# Altium PCB PCB_SUB_BUTTON.PcbDoc
Units mm, origin at the board's own origin, x right, y up, seen from the top; angles counter-clockwise.
Board outline 60.55 x 90.09 mm, 2 copper layers (Top Layer, Bottom Layer); 20 components, 20 nets, 84 pads, 28 vias.
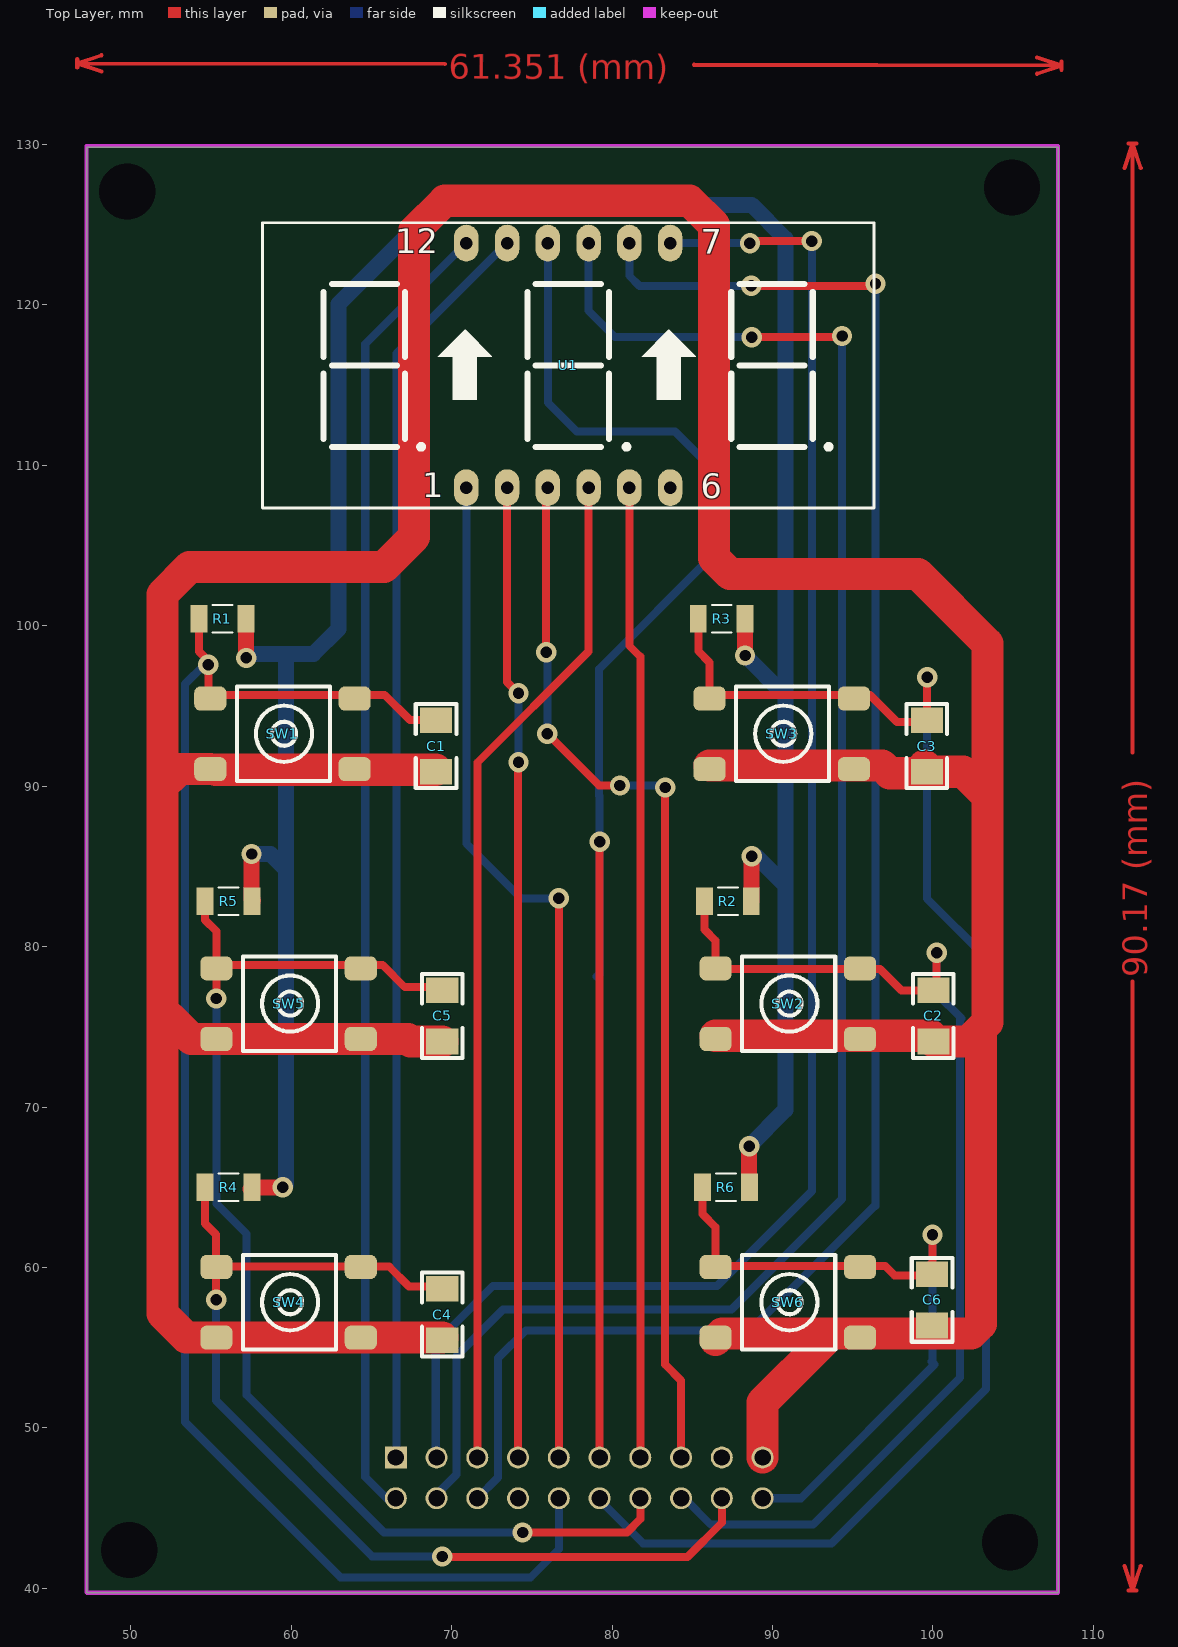
[diagram p0: Top Layer view]
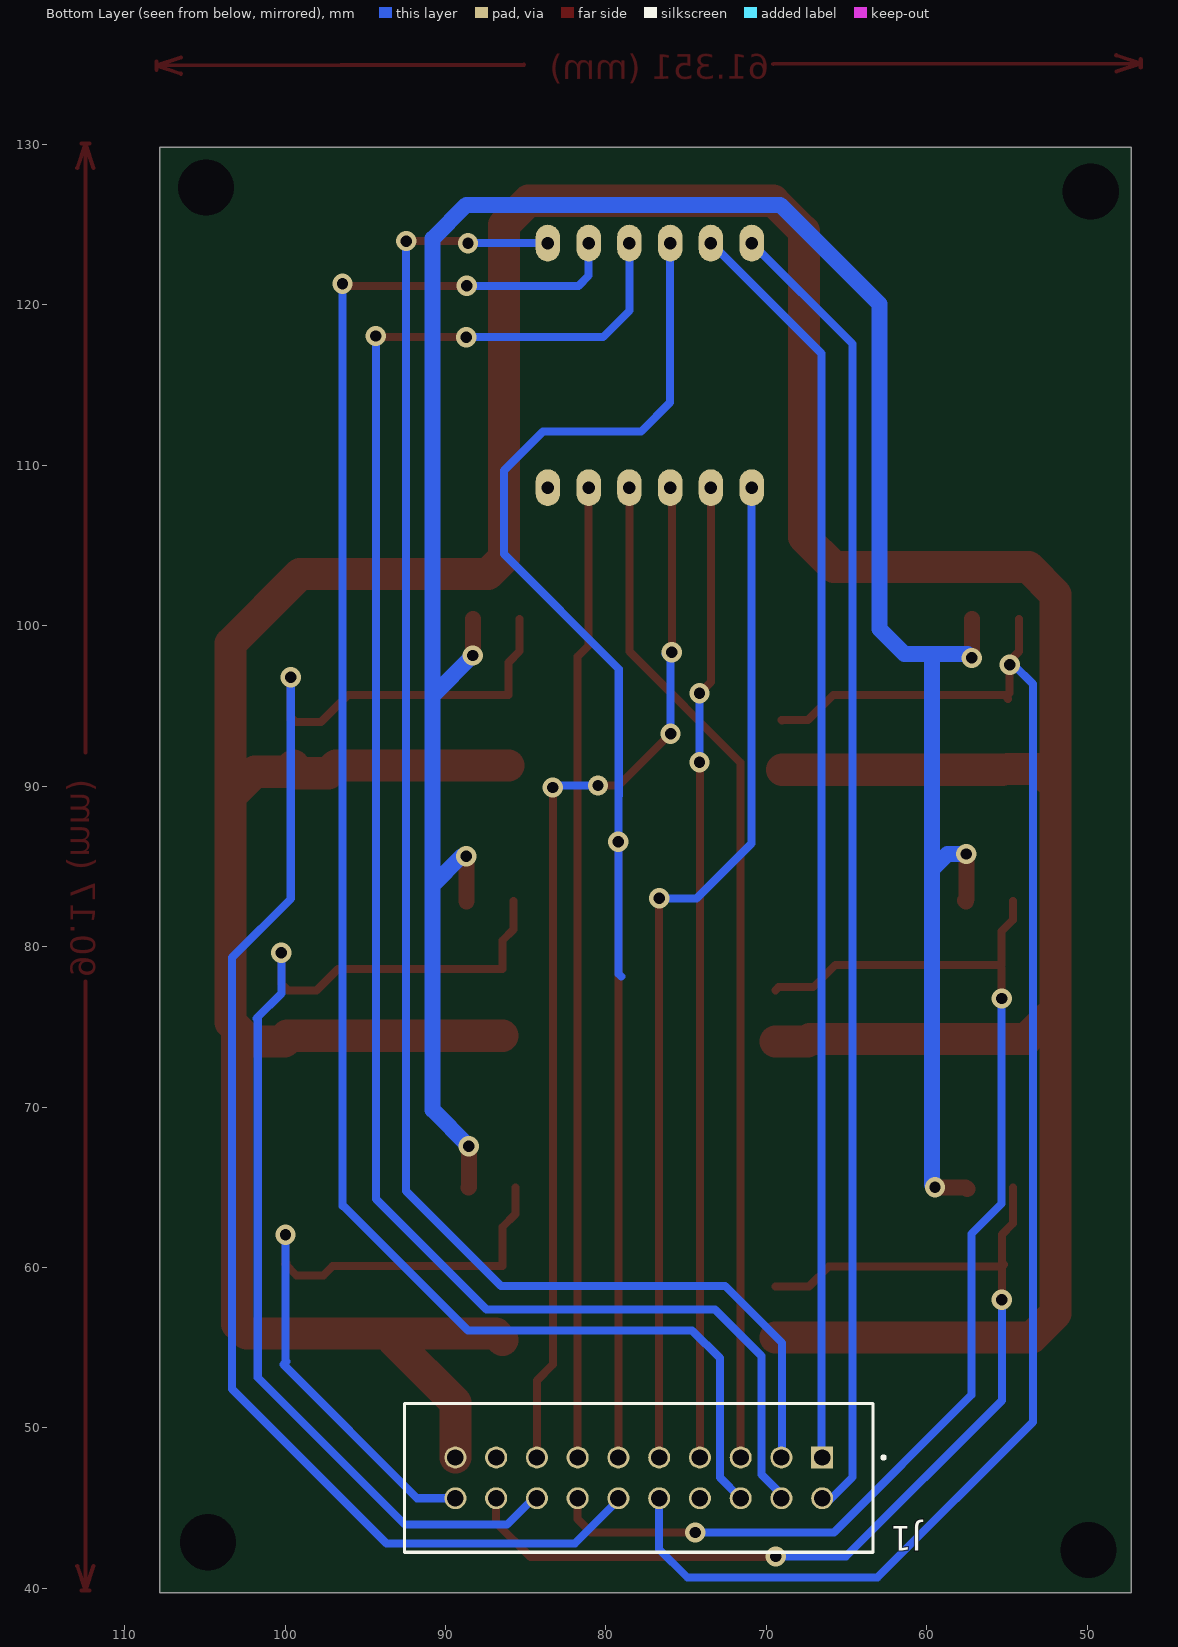
[diagram p1: Bottom Layer view, seen from below]
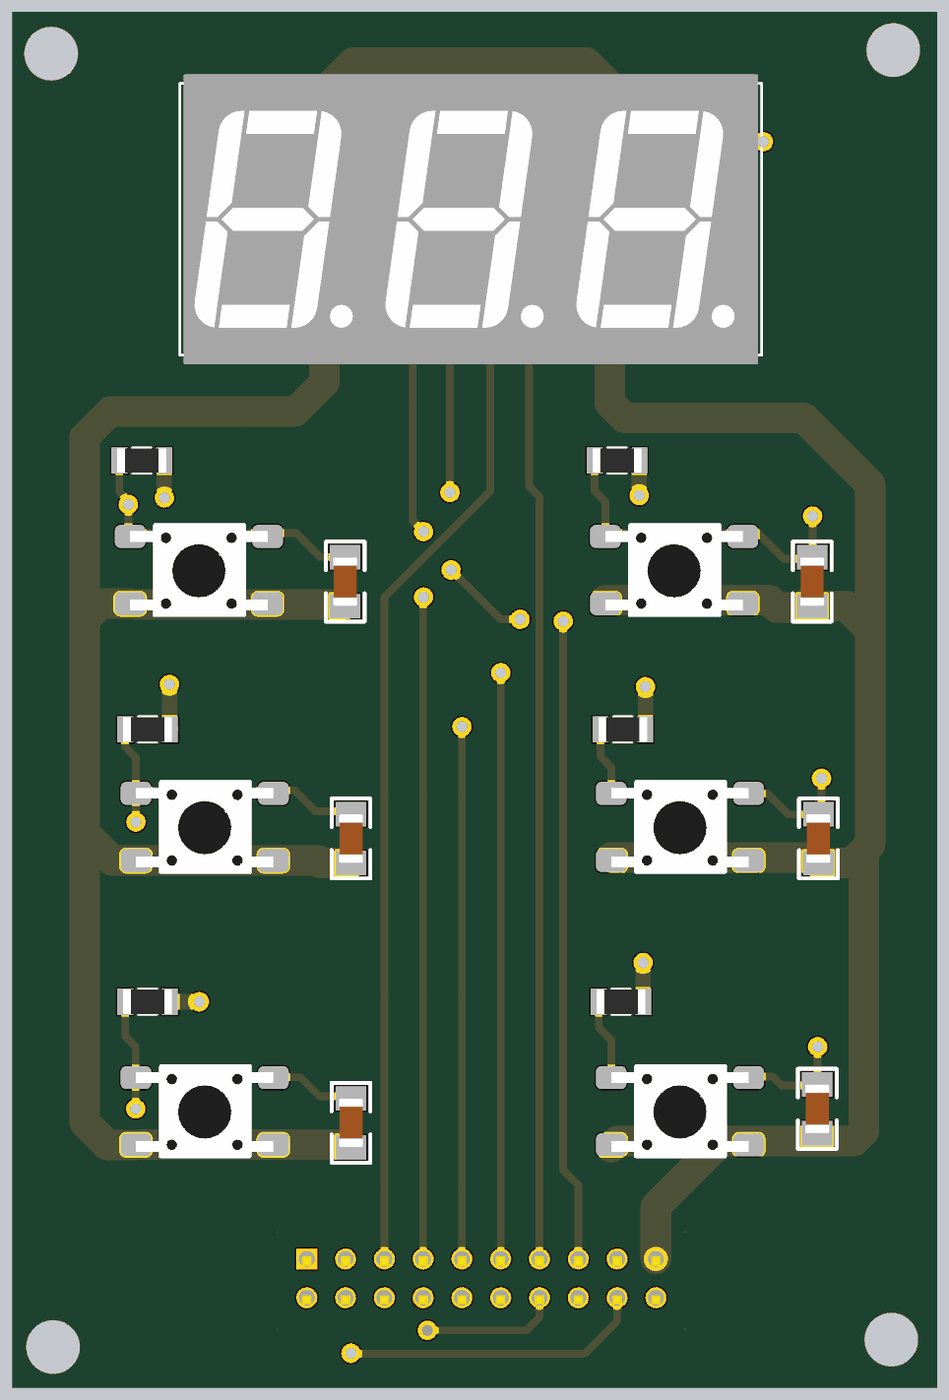
[diagram p2: 3D render of the assembled board from above, using the file's embedded part models]

## Layer stack, top to bottom
Top Solder: solder mask 0.0102, Solder Resist, Dk 3.5
Top Layer: signal copper 0.0356
Dielectric 1: dielectric 0.32, FR-4, Dk 4.8
Bottom Layer: signal copper 0.0356
Bottom Solder: solder mask 0.0102, Solder Resist, Dk 3.5

## Board outline
47.244,39.751 47.269,39.726 107.798,39.726 107.798,129.819 47.244,129.819

## Design rules (kind name [scope] priority, off if disabled: settings)
Clearance [All] p1: gap=0.254
PolygonConnect [All] p1: connectstyle=Relief reliefconductorwidth=0.254 reliefentries=4 polygonreliefangle="90 Angle" airgapwidth=0.254
RoutingVias [All] p1: holewidth=0.711 width=1.27 viastyle="Through Hole" minholewidth=0.711 minwidth=1.27 maxholewidth=0.711 maxwidth=1.27
SolderMaskExpansion [All] p1: expansion=0.102
Width [All] p1: maxlimit=3 minlimit=0.5 preferedwidth=1
30 further rules are at their usual default settings.

## Components (designator, comment, footprint, x,y, rotation, side; value= is the part's Value field where it differs from the comment)
C1 "Cap_SMD" CAP_SMD_1206 69.037,92.507 r90 top
C2 "Cap_SMD" CAP_SMD_1206 100.025,75.686 r90 top
C3 "Cap_SMD" CAP_SMD_1206 99.619,92.507 r90 top
C4 "Cap_SMD" CAP_SMD_1206 69.418,57.074 r90 top
C5 "Cap_SMD" CAP_SMD_1206 69.418,75.686 r90 top
C6 "Cap_SMD" CAP_SMD_1206 99.949,57.988 r90 top
J1 "JTAG 10x2" JTAG 66.523,48.158 r0 bottom
R1 "Res_SMD" Res_SMD_1206 55.717,100.432 r180 top
R2 "Res_SMD" Res_SMD_1206 87.217,82.829 r180 top
R3 "Res_SMD" Res_SMD_1206 86.836,100.432 r180 top
R4 "Res_SMD" Res_SMD_1206 56.098,64.999 r180 top
R5 "Res_SMD" Res_SMD_1206 56.098,82.829 r180 top
R6 "Res_SMD" Res_SMD_1206 87.097,64.999 r180 top
SW1 "Button6x6" Button6x6smd 59.457,93.265 r180 top
SW2 "Button6x6" Button6x6smd 90.957,76.444 r180 top
SW3 "Button6x6" Button6x6smd 90.576,93.265 r180 top
SW4 "Button6x6" Button6x6smd 59.838,57.832 r180 top
SW5 "Button6x6" Button6x6smd 59.838,76.444 r180 top
SW6 "Button6x6" Button6x6smd 90.957,57.832 r180 top
U1 "7SEG" 7SEG 70.917,108.61 r0 top

## Footprints (in the part's own frame and the unit in brackets; to place one, negate y for a bottom-side part, rotate by r counter-clockwise, add the part's x,y. Pads: shape width x height; smd on the part's side, far side on the other; paste and mask are expansions set on the pad)
7SEG [mil] "DIP 12 Leads; Body 48 x 20 mm; Pitch 0.5 mm"
  oval 60x90 hole 31: 1(0,0) 2(100,0) 3(200,0) 4(300,0) 5(400,0) 6(500,0) 7(500,600) 8(400,600) 9(300,600) 10(200,600) 11(100,600) 12(0,600)
  silkscreen extent -500,-50 1000,650, body extent -490,-74 990,674, height 400
Button6x6smd [mm] "key smd"
  rrect50% 2x1.5 smd: 1(4.5,-2.2) 2(-4.5,-2.2) 3(4.5,2.2) 4(-4.5,2.2)
  Top Layer pour cut-out: -6,3.5 6,3.5 6,-3.5 -6,-3.5
  silkscreen extent -2.95,-2.95 2.85,2.95, body extent -4.5,-2.95 4.5,3.05, height 4.3
CAP_SMD_1206 [mm] "cap smd 1206"
  rect 1.6x2 smd: 1(-1.605,0) 2(1.595,0)
  Top Layer pour cut-out: -0.8,0.9 0.8,0.9 0.8,-0.9 -0.8,-0.9
  silkscreen extent -2.62,-1.27 2.62,1.27, body extent -1.6,-0.8 1.6,0.8, height 1.22
JTAG [mm] "JTAG 10x2"
  rect 1.37x1.37 hole 1.02: 01(0,0)
  round 1.37 hole 1.02: 02(0,2.54) 03(2.54,0) 04(2.54,2.54) 05(5.08,0) 06(5.08,2.54) 07(7.62,0) 08(7.62,2.54) 09(10.16,0) 10(10.16,2.54) 11(12.7,0) 12(12.7,2.54) 13(15.24,0) 14(15.24,2.54) 15(17.78,0) 16(17.78,2.54) 17(20.32,0) 18(20.32,2.54) 19(22.86,0) 20(22.86,2.54)
  silkscreen extent -3.92,-3.36 26.04,5.9, body extent -3.18,-3.43 26.03,6.05, height 8.89
Res_SMD_1206 [mm] "res smd 1206"
  rect 1.05x1.72 smd: 1(-1.46,0) 2(1.46,0)
  Top Layer pour cut-out: -0.9,0.8 0.9,0.8 0.9,-0.8 -0.9,-0.8
  silkscreen extent -0.62,-0.85 0.62,0.85, body extent -1.6,-0.8 1.6,0.8, height 0.6

## Part data
C1 C2 C3 C4 C5 C6: "Cap SMD multiple types as 0402 0603 0805 1206"
J1: "Connector Header Through Hole 20 position 0.100 (2.54mm)"
R1 R2 R3 R4 R5 R6: "res smd"
SW1 SW2 SW3 SW4 SW5 SW6: "button 6x6 mm"
U1: library part "LED 7SEG", "Three 7 Seg Dipslay"

## Free pads (board coordinates)
  round 1.524 hole 3.5: 0(49.784,127.076) 0(49.911,42.393) 0(104.8,42.875) 0(104.927,127.305)

## Via types
v1: diameter 1.27, hole 0.711, Top Layer to Bottom Layer, 28 vias

## Nets (pads, with @x,y where several pads share a name; then routed paths per layer and width w, separated by ;. In a path a pad name is that pad's centre, name@x,y a point inside that pad or via, vN(x,y) a via of type N, cw(c..) or ccw(c..) an arc to the next point about the centre after c; other vN are vias at no path point)
5V: R1.1 R2.1 R3.1 R4.1 R5.1 R6.1 | length 172.6
  Top Layer w1: R1.1 57.177,98.017 v1(57.201,97.993) ; R4.1@57.48,64.897 57.582,64.999 v1(59.487,64.999) ; v1(57.531,85.776) 57.531,82.955 57.607,82.878 R5.1 ; v1(88.29,98.146) 88.296,98.152 R3.1 ; v1(88.544,67.564) 88.544,65.011 R6.1 ; R2.1 88.697,82.849 v1(88.697,85.623)
  Bottom Layer w1: v1(57.201,97.993) 57.455,98.247 61.392,98.247 62.941,99.797 62.941,120.04 69.139,126.238 88.697,126.238 90.805,124.13 90.805,83.82 ; v1(57.531,85.776) 58.699,85.776 59.665,84.811 ; v1(59.487,64.999) 59.665,65.176 59.665,84.811 ; 59.665,97.993 59.665,84.811 ; v1(88.29,98.146) 90.729,95.707 ; v1(88.544,67.564) 90.805,69.825 90.805,83.82 ; v1(88.697,85.623) 89.002,85.623 90.805,83.82
BUT_IN_1: C1.2 J1.10 R1.2 SW1.1 SW1.2 | length 99.2
  Top Layer w0.5: R1.2 54.257,98.397 54.839,97.815 v1(54.839,97.561) 54.839,95.806 SW1.1@54.957,95.688 ; SW1.1@54.929,95.436 SW1.1 SW1.1@54.957,95.688 ; C1.2 C1.2@69.063,94.127 ; C1.2@69.037,94.121 67.397,94.121 65.831,95.688 SW1.1@54.957,95.688
  Bottom Layer w0.5: v1(54.839,97.561) 54.585,97.561 53.391,96.368 53.391,50.368 63.068,40.691 74.93,40.691 76.683,42.443 J1.10
BUT_IN_2: C3.2 J1.12 R3.2 SW3.1 SW3.2 | length 97.2
  Top Layer w0.5: R3.2 85.376,98.418 86.076,97.718 86.076,95.688 96.082,95.688 97.765,94.005 99.325,94.005 C3.2@99.52,94.201 ; C3.2 99.644,94.127 v1(99.644,96.799)
  Bottom Layer w0.5: J1.12 79.172,45.568 81.94,42.799 93.675,42.799 103.302,52.426 103.302,79.324 99.619,83.007 99.644,83.033 99.644,94.087 ; 99.639,94.082 99.644,94.087 ; v1(99.644,96.799) 99.644,94.087
BUT_IN_3: C5.2 J1.14 R5.2 SW5.1 SW5.2 | length 76.1
  Top Layer w0.5: R5.2 54.638,81.658 55.338,80.958 55.338,78.847 65.704,78.847 67.081,77.47 69.229,77.47 C5.2 ; v1(55.338,76.767) SW5.1 ; v1(74.422,43.485) 80.924,43.485 81.763,44.323 J1.14
  Bottom Layer w0.5: v1(55.338,76.767) 55.338,63.974 57.226,62.086 57.226,52.045 65.786,43.485 v1(74.422,43.485)
BUT_IN_4: C2.2 J1.16 R2.2 SW2.1 SW2.2 | length 70
  Top Layer w0.5: R2.2 85.757,81.07 86.457,80.37 SW2.1 86.457,78.613 96.698,78.613 98.044,77.267 99.808,77.267 100.228,77.688 v1(100.228,79.629)
  Bottom Layer w0.5: J1.16 84.506,45.618 86.157,43.967 92.532,43.967 101.702,53.137 101.702,75.463 101.772,75.534 100.228,77.078 v1(100.228,79.629)
BUT_IN_5: C4.2 J1.18 R4.2 SW4.1 SW4.2 | length 66.6
  Top Layer w0.5: R4.2 54.638,62.735 55.321,62.052 55.321,60.173 55.197,60.173 SW4.1@55.321,60.049 ; v1(55.321,57.988) SW4.1@55.321,60.049 ; SW4.1 SW4.1@55.321,60.049 ; v1@69.418,41.961 84.709,41.961 86.843,44.094 J1.18 ; v1(69.418,41.986) v1@69.418,42.24 ; C4.2@69.418,58.815 67.346,58.815 66.113,60.049 SW4.1@55.321,60.049
  Bottom Layer w0.5: v1(55.321,57.988) 55.321,51.714 65.049,41.986 v1(69.418,41.986)
BUT_IN_6: C6.2 J1.20 R6.2 SW6.1 SW6.2 | length 43.6
  Top Layer w0.5: R6.2 85.637,63.334 86.457,62.514 86.457,60.096 97.028,60.096 97.612,59.512 99.299,59.512 100,60.213 99.924,60.289 99.974,60.34 v1(99.974,62.052)
  Bottom Layer w0.5: J1.20 91.77,45.618 100.101,53.95 99.924,54.127 99.974,54.178 v1(99.974,62.052)
GND: C1.1 C2.1 C3.1 C4.1 C5.1 C6.1 J1.19 SW1.3 SW1.4 SW2.3 SW2.4 SW3.3 SW3.4 SW4.3 SW4.4 SW5.3 SW5.4 SW6.3 SW6.4 | length 296.3
  Top Layer w2: 52.451,75.59 53.797,74.244 SW5.3 SW5.4 67.285,74.244 67.447,74.081 C5.1 ; 52.451,90.475 53.041,91.065 SW1.3 ; SW1.3@55.298,91.023 C1.1@69.012,91.023 ; SW4.3 53.461,55.632 51.968,57.125 51.968,101.956 53.67,103.657 65.786,103.657 67.666,105.537 67.666,124.587 69.571,126.492 84.836,126.492 86.36,124.968 86.36,104.216 87.351,103.226 99.06,103.226 103.403,98.882 103.403,89.373 ; SW4.3@55.704,55.641 C4.1@69.418,55.641 ; SW3.3@86.076,91.288 96.825,91.288 97.307,90.805 99.324,90.805 99.644,91.125 C3.1@99.481,91.288 ; SW6.3@86.457,55.469 86.868,55.88 102.387,55.88 102.997,56.49 102.997,74.879 102.199,74.081 C2.1 ; SW2.3@86.457,74.447 99.862,74.447 C2.1@100.025,74.285 ; J1.19 89.383,51.583 93.269,55.469 ; C3.1 101.875,90.902 103.403,89.373 ; 103.403,75.286 103.403,89.373
LED_7_1: J1.01 U1.11 | length 78.6
  Bottom Layer w0.5: J1.01 66.573,48.209 66.573,116.967 U1.11
LED_7_2: J1.03 U1.7 | length 102.7
  Top Layer w0.5: v1(88.595,123.85) 88.621,123.876 88.748,123.749 88.976,123.977 v1(92.456,123.977)
  Bottom Layer w0.5: J1.03 69.012,48.209 69.012,55.296 72.568,58.852 86.538,58.852 92.456,64.77 v1(92.456,123.977) ; U1.7 v1(88.595,123.85)
LED_7_3: J1.05 U1.4 | length 63.3
  Top Layer w0.5: J1.05 71.603,91.465 78.537,98.4 U1.4
LED_7_4: J1.07 U1.2 | length 60.8
  Top Layer w0.5: U1.2 73.457,96.495 v1(74.168,95.783) ; J1.07 74.143,91.465 v1(74.168,91.491)
  Bottom Layer w0.5: v1(74.168,91.491) v1(74.168,95.783)
LED_7_5: J1.09 U1.1 | length 64.2
  Top Layer w0.5: J1.09 v1(76.683,83.007)
  Bottom Layer w0.5: U1.1 70.917,86.436 74.346,83.007 v1(76.683,83.007)
LED_7_6: J1.11 U1.10 | length 95.1
  Top Layer w0.5: J1.11 79.146,48.235 79.223,48.311 v1(79.223,86.538)
  Bottom Layer w0.5: U1.10 75.997,113.919 77.8,112.116 83.922,112.116 86.36,109.677 86.36,104.47 79.201,97.311 79.201,89.419 79.223,89.397 v1(79.223,86.538) 79.223,78.308 79.045,78.13
LED_7_7: J1.13 U1.5 | length 60.7
  Top Layer w0.5: U1.5 81.077,98.755 81.763,98.069 J1.13
LED_7_8: J1.15 U1.3 | length 67.4
  Top Layer w0.5: v1(75.895,98.349) 75.895,108.509 U1.3 ; v1(75.971,93.269) 79.197,90.043 v1(80.493,90.043) ; v1(83.312,89.916) 83.312,53.95 84.303,52.959 J1.15
  Bottom Layer w0.5: v1(75.971,93.269) 75.971,98.273 v1(75.895,98.349) 76.175,98.349 v1@76.276,98.247 ; v1(80.493,90.043) 83.414,90.043 v1@83.541,89.916 ; v1(83.312,89.916) v1@83.541,89.916 ; v1@83.668,89.789 v1@83.541,89.916
OUT_LED_1: J1.02 U1.12 | length 82
  Bottom Layer w0.5: J1.02 65.938,45.618 64.618,46.939 64.618,117.551 U1.12
OUT_LED_2: J1.04 U1.9 | length 112.4
  Top Layer w0.5: v1(88.697,117.983) 94.259,117.983 v1(94.336,118.059)
  Bottom Layer w0.5: J1.04@69.444,45.618 J1.04 69.063,45.847 70.307,47.092 70.307,54.483 73.203,57.379 87.452,57.379 94.336,64.262 v1(94.336,118.059) ; U1.9 78.537,119.634 80.188,117.983 v1(88.697,117.983)
OUT_LED_3: J1.06 U1.8 | length 112.7
  Top Layer w0.5: v1@88.9,121.31 88.849,121.361 v1(88.671,121.183) 96.495,121.183 v1@96.622,121.31 ; v1(96.418,121.31) v1@96.622,121.31 ; v1@96.672,121.31 v1@96.622,121.31
  Bottom Layer w0.5: J1.06 72.898,46.914 72.898,54.356 74.625,56.083 88.595,56.083 96.355,63.843 96.418,63.843 v1(96.418,121.31) ; U1.8 81.077,121.818 81.712,121.183 v1(88.671,121.183)
OUT_LED_4: J1.08
pads on no net: J1.17 U1.6
copper on no net: | length 136.6
  Top Layer w0.254: 46.664,134.802 46.666,135.31 ; 48.188,134.544 46.665,135.056 ; 48.19,135.56 46.665,135.056 ; 69.571,135.001 46.665,135.056 ; 85.111,134.964 108.016,134.909 ; 106.491,134.404 108.016,134.909 ; 106.493,135.42 108.016,134.909 ; 108.016,134.655 108.017,135.163 ; 111.938,41.402 112.446,39.878 ; 111.938,128.524 112.446,130.048 ; 112.192,39.878 112.7,39.878 ; 112.192,130.048 112.7,130.048 ; 112.446,77.828 112.446,39.878 ; 112.446,92.098 112.446,130.048 ; 112.954,41.402 112.446,39.878 ; 112.954,128.524 112.446,130.048

## Keep-outs
Top Layer:
  lines w0.254: 47.244,39.751 47.244,129.896 107.798,129.896 107.798,39.726 47.6,39.726 47.269,39.726 47.244,39.751

## Other copper
Top Layer:
  text "61.351 (mm)" at 69.822,134.086 h1.52 r359.86
  text "90.17 (mm)" at 113.36,78.082 h1.52 r90

## Text inside footprints (layer, text, board x,y; h text height)
U1: Top Overlay "12" at 66.472,123.215 h1.52; Top Overlay "7" at 85.522,123.19 h1.52; Top Overlay "1" at 68.174,108.001 h1.52; Top Overlay "6" at 85.522,107.95 h1.52